# Altium PCB Grabber.PCBDOC (part 3 of 5)
Units mil, origin at the board's own origin, x right, y up, seen from the top; angles counter-clockwise.
Board outline 2854.33 x 3937 mil, 4 copper layers (TopLayer, Internal Plane 2, Layer 1, Bottom Layer), stack 60.752 mil thick; 159 components, 116 nets, 684 pads, 241 vias.
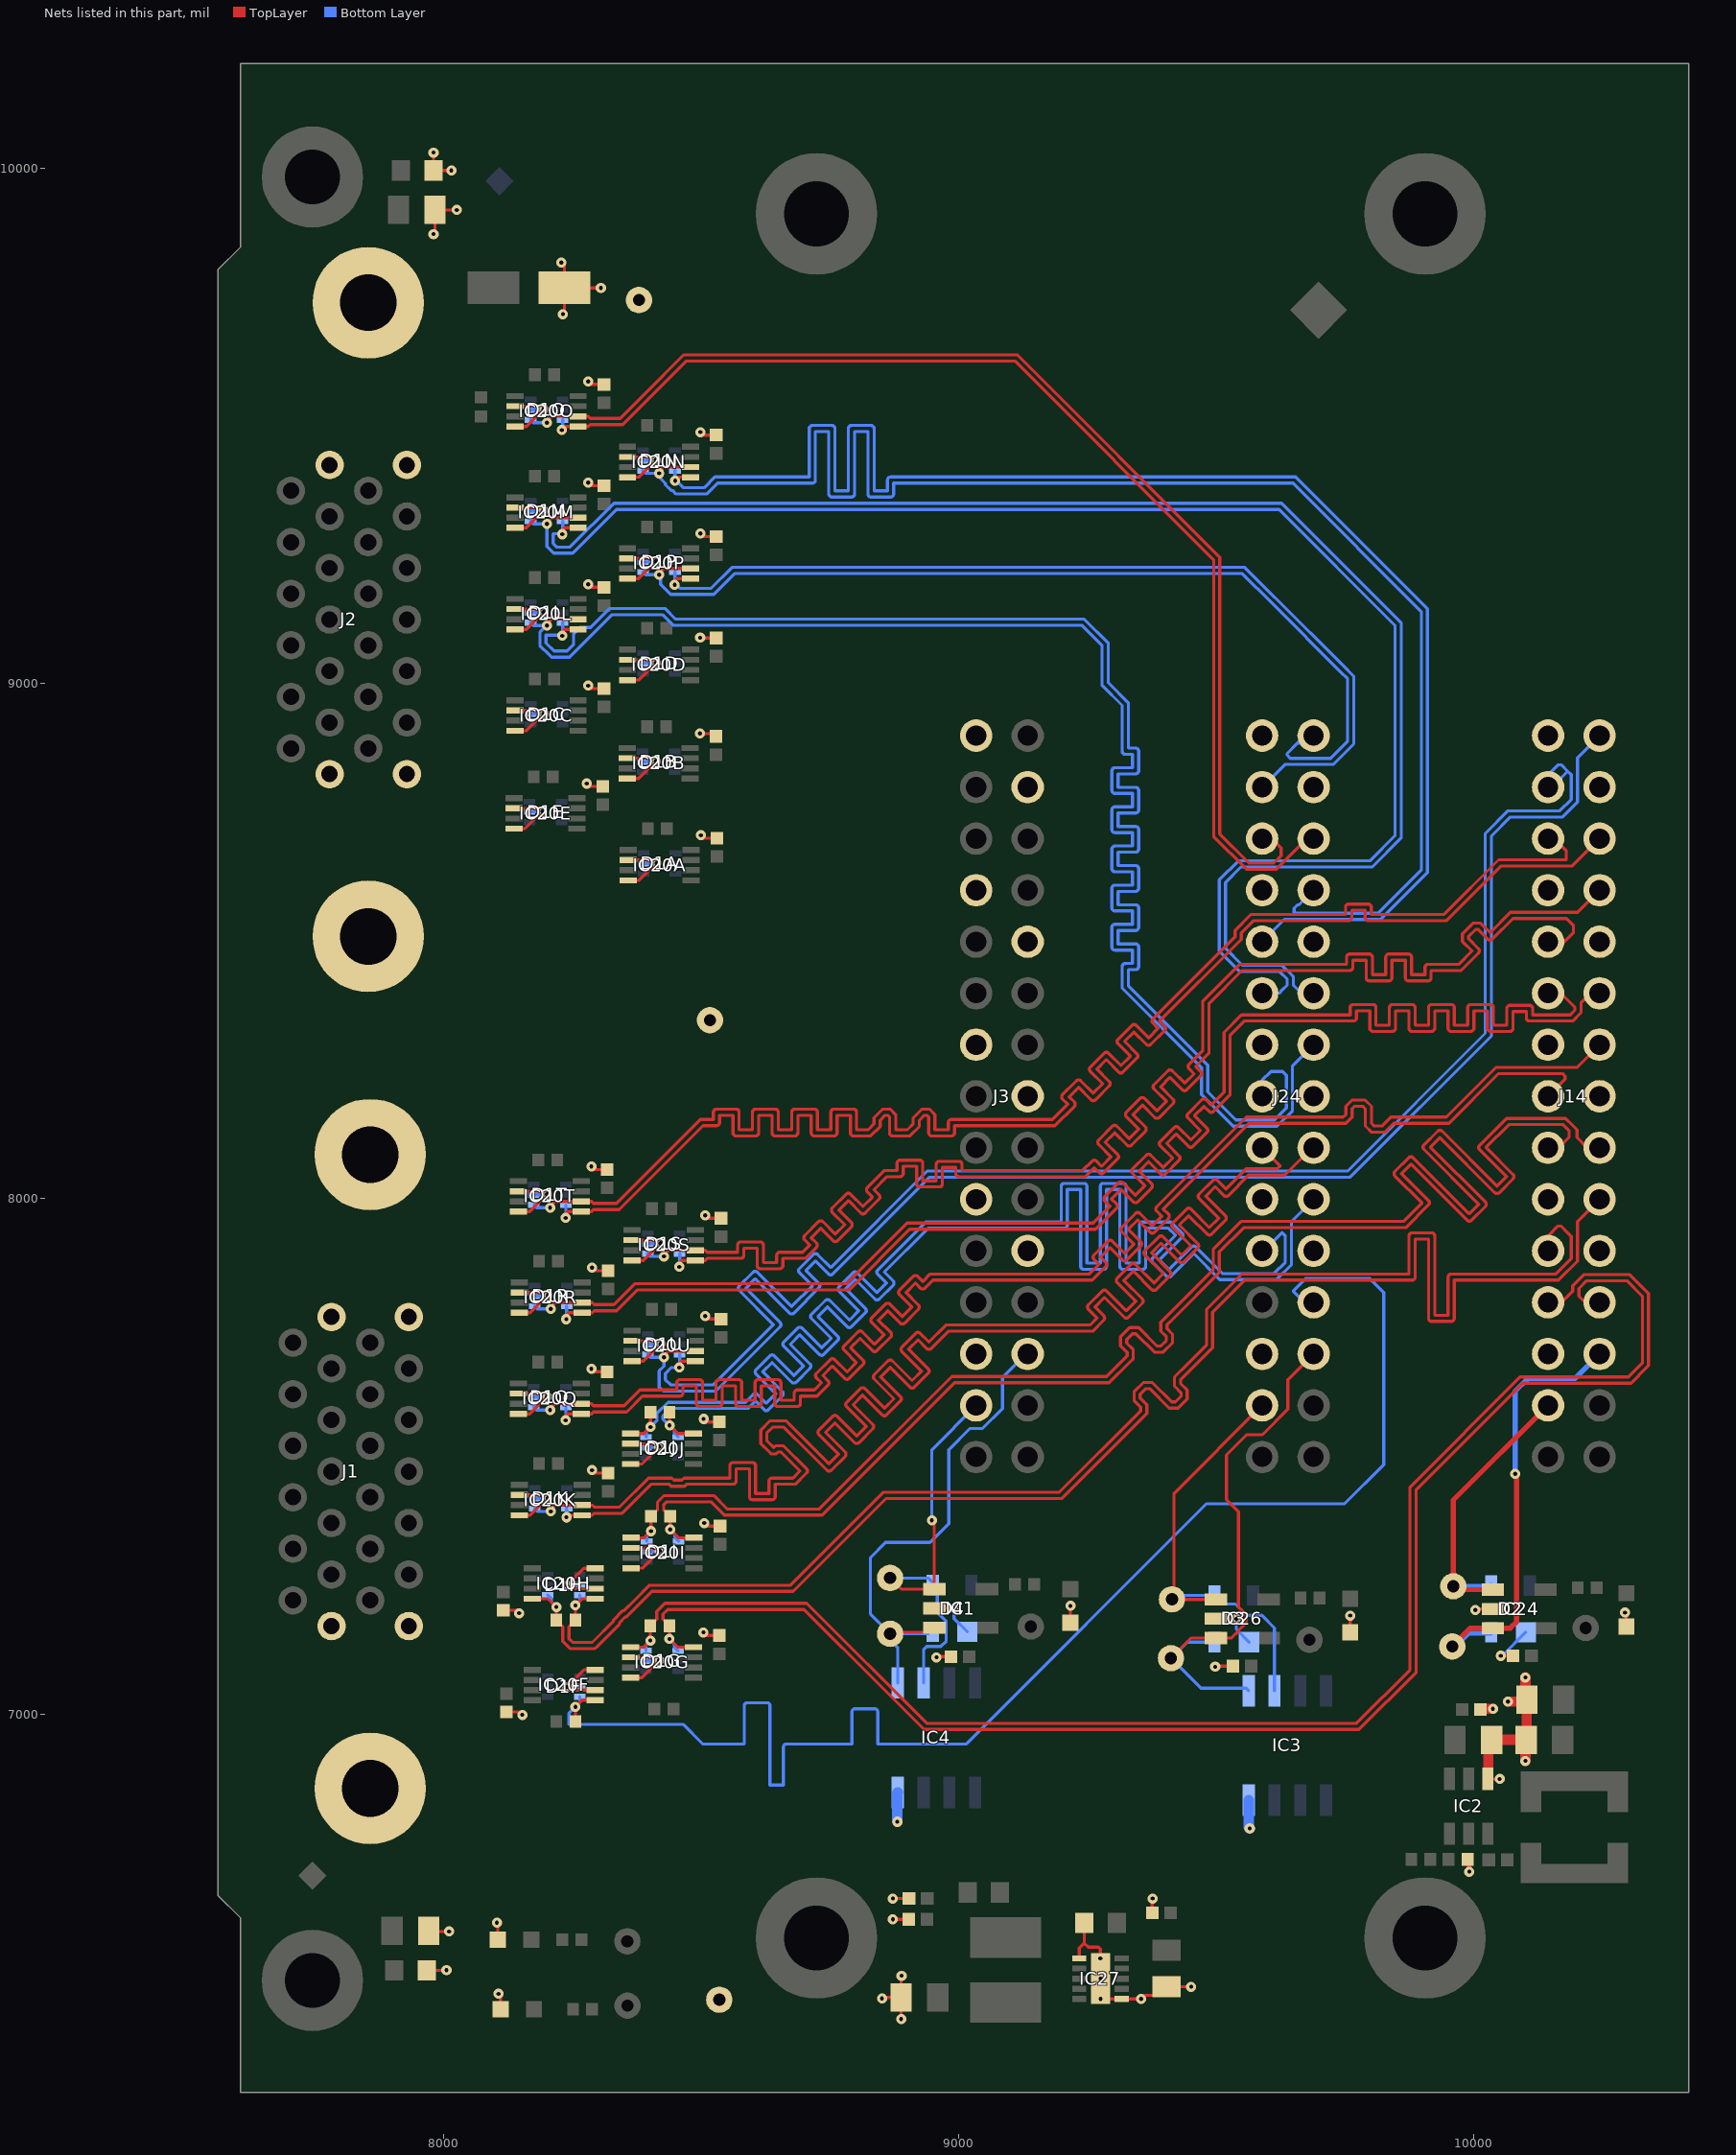
[diagram p4: the nets of this part, all layers, seen from the top]

## Via types
v1: diameter 19.68, hole 7.87, TopLayer to Bottom Layer, tented both sides, 241 vias

## Nets (pads, with @x,y where several pads share a name; then routed paths per layer and width w, separated by ;. In a path a pad name is that pad's centre, name@x,y a point inside that pad or via, vN(x,y) a via of type N, cw(c..) or ccw(c..) an arc to the next point about the centre after c; other vN are vias at no path point) (continued)
GND: B5.1 B7.1 B9.1 C1.2 C2.2 C3.1 C5.1 C6.1 C7.1 C8.1 C47A.1 C47B.1 C47C.1 C47D.1 C47E.1 C47F.1 C47G.1 C47H.1 C47I.1 C47J.1 C47K.1 C47L.1 C47M.1 C47N.1 C47O.1 C47P.1 C47Q.1 C47R.1 C47S.1 C47T.1 C47U.1 C58.1 C59.1 C62.2 C64.1 C65.1 C66.1 C67.1 C68.1 D1A.2 D1B.2 D1C.2 D1D.2 D1E.2 D1F.2 D1G.2 D1H.2 D1I.2 D1J.2 D1K.2 D1L.2 D1M.2 D1N.2 D1O.2 D1P.2 D1Q.2 D1R.2 D1S.2 D1T.2 D1U.2 D2.1 D3.1 D4.1 IC1.2 IC2.1 IC3.4 IC4.4 IC20A.2 IC20A.4 IC20B.2 IC20B.4 IC20C.2 IC20C.4 IC20D.2 IC20D.4 IC20E.2 IC20E.4 IC20F.2 IC20F.4 IC20G.2 IC20G.4 IC20H.2 IC20H.4 IC20I.2 IC20I.4 IC20J.2 IC20J.4 IC20K.2 IC20K.4 IC20L.2 IC20L.4 IC20M.2 IC20M.4 IC20N.2 IC20N.4 IC20O.2 IC20O.4 IC20P.2 IC20P.4 IC20Q.2 IC20Q.4 IC20R.2 IC20R.4 IC20S.2 IC20S.4 IC20T.2 IC20T.4 IC20U.2 IC20U.4 IC24.2 IC26.2 IC27.1 IC27.6 IC27.11 J1.1 J1.13 J1.14 J1.26 J1.27 J1.28 J2.1 J2.13 J2.14 J2.26 J2.27 J2.28 J3.1 J3.4 J3.7 J3.10 J3.13 J3.16 J3.19 J3.22 J3.25 J14.1 J14.4 J14.7 J14.10 J14.13 J14.16 J14.19 J14.22 J14.25 J24.1 J24.4 J24.7 J24.10 J24.13 J24.16 J24.19 J24.22 J24.25 LD1.1 LD5.1 LD6.1 LD7.1 LD8.1 R5.1 R6.1 R11.1 R122.1 | length 6027
  TopLayer w6: R6.1@7967.5,6502.22 8005.22,6502.22 v1(8006,6503) ; C2.2@7971.43,6578.99 7972.43,6578 v1(8011,6578) ; v1(7980.84,9872.33) 7983.91,9875.41 C1.2@7983.91,9919.32 v1(8026.24,9919.32) ; v1(7980.84,10030.68) R5.1@7980.84,9996 v1(8015.45,9996) ; v1(8104,6595) 8105.52,6593.48 LD6.1@8105.52,6562 ; v1(8107,6457) 8110.92,6453.08 LD5.1@8110.92,6427.42 ; C47H.1@8116.3,7201.59 8146.1,7201.59 8147.09,7200.61 v1(8147.09,7195.72) ; C47F.1@8122.46,7004.15 8152.26,7004.15 8153.24,7003.17 v1(8153.24,6998.28) ; IC20E.4@8136.91,8718.44 8158.56,8718.44 v1(8192.02,8751.91) 8186.12,8757.81 IC20E.2@8136.91,8757.81 ; IC20C.4@8139.46,8908.4 8161.12,8908.4 v1(8194.58,8941.87) 8188.68,8947.77 IC20C.2@8139.46,8947.77 ; IC20L.4@8139.46,9105.25 8161.12,9105.25 v1(8194.58,9138.72) 8188.68,9144.62 IC20L.2@8139.46,9144.62 ; IC20M.4@8139.46,9302.38 8161.12,9302.38 v1(8194.58,9335.84) 8188.68,9341.75 IC20M.2@8139.46,9341.75 ; IC20O.4@8139.46,9498.95 8161.12,9498.95 v1(8194.58,9532.42) 8188.68,9538.32 IC20O.2@8139.46,9538.32 ; IC20Q.4@8145.76,7582.61 8167.42,7582.61 v1(8200.88,7616.08) 8194.98,7621.98 IC20Q.2@8145.76,7621.98 ; IC20T.4@8145.76,7975.29 8167.42,7975.29 v1(8200.88,8008.76) 8194.98,8014.66 IC20T.2@8145.76,8014.66 ; IC20K.4@8147.14,7385.8 8168.8,7385.8 v1(8202.26,7419.27) 8196.35,7425.17 IC20K.2@8147.14,7425.17 ; IC20R.4@8147.14,7778.8 8168.8,7778.8 v1(8202.26,7812.26) 8196.35,7818.17 IC20R.2@8147.14,7818.17 ; v1(8229.03,9817.21) 8234.9,9811.35 C62.2@8234.9,9768 ; v1(8231.98,9716.98) 8234.9,9719.89 C62.2@8234.9,9768 ; v1(8278.36,8806) 8278.36,8801.12 8279.35,8800.13 C47E.1@8309.15,8800.13 ; v1(8280.92,8995.96) 8280.92,8991.08 8281.91,8990.09 C47C.1@8311.71,8990.09 ; v1(8280.92,9192.81) 8280.92,9187.93 8281.91,9186.94 C47L.1@8311.71,9186.94 ; v1(8280.92,9389.94) 8280.92,9385.06 8281.91,9384.07 C47M.1@8311.71,9384.07 ; v1(8280.92,9586.51) 8280.92,9581.63 8281.91,9580.65 C47O.1@8311.71,9580.65 ; v1(8287.22,7670.17) 8287.22,7665.29 8288.2,7664.31 C47Q.1@8318.01,7664.31 ; v1(8287.22,8062.85) 8287.22,8057.97 8288.2,8056.98 C47T.1@8318.01,8056.98 ; v1(8288.6,7473.36) 8288.6,7468.48 8289.58,7467.5 C47K.1@8319.39,7467.5 ; v1(8288.6,7866.35) 8288.6,7861.47 8289.58,7860.49 C47R.1@8319.39,7860.49 ; IC20F.2@8294.7,7046.47 8245.49,7046.47 v1(8239.58,7052.38) 8273.05,7085.84 IC20F.4@8294.7,7085.84 ; IC20H.2@8294.7,7243.32 8245.49,7243.32 v1(8239.58,7249.23) 8273.05,7282.69 IC20H.4@8294.7,7282.69 ; v1(8305.76,9768) C62.2@8234.9,9768 ; IC20B.4@8356.98,8815.88 8378.64,8815.88 v1(8412.1,8849.35) 8406.2,8855.25 IC20B.2@8356.98,8855.25 ; IC20D.4@8357.38,9006.83 8379.03,9006.83 v1(8412.5,9040.29) 8406.59,9046.2 IC20D.2@8357.38,9046.2 ; IC20P.4@8357.38,9203.68 8379.03,9203.68 v1(8412.5,9237.14) 8406.59,9243.05 IC20P.2@8357.38,9243.05 ; IC20N.4@8357.38,9400.53 8379.03,9400.53 v1(8412.5,9433.99) 8406.59,9439.9 IC20N.2@8357.38,9439.9 ; IC20A.4@8358.36,8618.09 8380.02,8618.09 v1(8413.48,8651.55) 8407.57,8657.46 IC20A.2@8358.36,8657.46 ; IC20G.4@8363.28,7070.8 8384.94,7070.8 v1(8418.4,7104.27) 8412.5,7110.17 IC20G.2@8363.28,7110.17 ; IC20J.4@8363.56,7485.21 8385.21,7485.21 v1(8418.68,7518.68) 8412.77,7524.58 IC20J.2@8363.56,7524.58 ; IC20I.4@8364.66,7283.13 8386.31,7283.13 v1(8419.78,7316.59) 8413.87,7322.5 IC20I.2@8364.66,7322.5 ; IC20U.4@8366.63,7684.98 8388.29,7684.98 v1(8421.75,7718.44) 8415.85,7724.35 IC20U.2@8366.63,7724.35 ; IC20S.4@8366.63,7880.49 8388.28,7880.49 v1(8421.75,7913.95) 8415.84,7919.86 IC20S.2@8366.63,7919.86 ; v1(8498,8903) 8523.8,8903 C47B.1@8529.23,8897.57 ; v1(8498.44,9089.11) 8507.38,9089.11 8507.97,9088.52 C47D.1@8529.62,9088.52 ; v1(8498.83,9291.24) 8498.83,9286.35 8499.82,9285.37 C47P.1@8529.62,9285.37 ; v1(8498.83,9488.09) 8498.83,9483.2 8499.82,9482.22 C47N.1@8529.62,9482.22 ; v1(8499.82,8705.65) 8499.82,8700.76 8500.8,8699.78 C47A.1@8530.61,8699.78 ; v1(8504.74,7158.36) 8504.74,7153.48 8505.72,7152.5 C47G.1@8535.53,7152.5 ; v1(8505.02,7572.77) 8505.02,7567.89 8506,7566.91 C47J.1@8535.8,7566.91 ; v1(8506.12,7370.69) 8506.12,7365.8 8507.1,7364.82 C47I.1@8536.91,7364.82 ; v1(8508.09,7772.54) 8508.09,7767.65 8509.07,7766.67 C47U.1@8538.88,7766.67 ; v1(8508.09,7968.05) 8508.09,7963.17 8509.07,7962.18 C47S.1@8538.87,7962.18 ; v1(8851.34,6448.06) 8853.34,6450.05 C66.1@8888.56,6450.05 ; v1(8872.4,6601.63) C59.1@8903.24,6601.63 ; v1(8872.4,6641.99) C65.1@8903.61,6641.98 ; v1(8888.56,6408.06) C66.1@8888.56,6450.05 ; v1(8889.34,6492.06) 8888.56,6491.28 C66.1@8888.56,6450.05 ; IC1.2@8952.82,7205 v1(8991.19,7205) ; v1(8957,7110) 8958.47,7111.47 C3.1@8985.28,7111.47 ; LD7.1@9217,7177.52 v1(9217,7210) ; IC27.6@9233.95,6525.84 9233.95,6545.53 9243.8,6555.37 ; R122.1@9243.8,6594.74 9243.8,6555.37 ; C67.1@9375.69,6614.43 9375.69,6641 v1(9376.67,6641.98) ; v1(9451.32,6470.72) C68.1@9403.24,6470.72 9386.51,6453.99 9360.9,6453.99 v1(9354.01,6447.1) IC27.1@9316.63,6447.1 v1(9275.29,6447.1) v1(9275.29,6486.47) 9275,6486.76 9275,6543.98 9271.49,6547.49 9251.67,6547.49 9243.8,6555.37 ; v1(9498,7091.79) 9499.21,7093 C64.1@9532.28,7093 ; IC26.2@9499.55,7184.9 v1(9539,7184.9) ; LD8.1@9759.97,7158.52 v1(9759.97,7191) ; v1(10003,7202) 10005,7204 IC24.2@10036.82,7204 ; IC2.1@10027.4,6874.15 10027.55,6874 v1(10050,6874) ; v1(10052,7113) C58.1@10076.28,7113 ; v1(10293.15,7197) 10296,7194.15 LD1.1@10296,7169.52
  TopLayer w10: R11.1@9988,6718 9991,6715 v1(9991,6694)
  TopLayer w20: C5.1@10012.72,7009 10013.72,7010 v1(10037,7010) ; IC2.1@10027.4,6874.15 10028.23,6874.98 10028.23,6945.23 C6.1@10032,6949 ; C6.1@10034.43,6950 10091,6950 C8.1@10095,6954 ; v1(10066,7024) 10099.13,7024 C7.1@10103.13,7028 10100,7031.13 v1(10100,7071) ; C7.1@10094,7023 10102.35,7014.65 10102.35,6950.78 C8.1@10101.57,6950 10100,6948.43 v1(10100,6909)
  Bottom Layer w6: D1E.2@8166.83,8750.92 8191.04,8750.92 v1(8192.02,8751.91) ; D1C.2@8169.39,8940.88 8193.6,8940.88 v1(8194.58,8941.87) ; D1L.2@8169.39,9137.73 8193.6,9137.73 v1(8194.58,9138.72) ; D1M.2@8169.39,9334.86 8193.6,9334.86 v1(8194.58,9335.84) ; D1O.2@8169.39,9531.43 8193.6,9531.43 v1(8194.58,9532.42) ; D1Q.2@8175.69,7615.09 8199.9,7615.09 v1(8200.88,7616.08) ; D1T.2@8175.69,8007.77 8199.9,8007.77 v1(8200.88,8008.76) ; D1K.2@8177.06,7418.28 8201.28,7418.28 v1(8202.26,7419.27) ; D1R.2@8177.06,7811.28 8201.28,7811.28 v1(8202.26,7812.26) ; v1(8239.58,7052.38) 8240.57,7053.36 D1F.2@8264.78,7053.36 ; v1(8239.58,7249.23) 8240.57,7250.21 D1H.2@8264.78,7250.21 ; D1B.2@8386.91,8848.36 8411.12,8848.36 v1(8412.1,8849.35) ; D1D.2@8387.3,9039.31 8411.51,9039.31 v1(8412.5,9040.29) ; D1P.2@8387.3,9236.16 8411.51,9236.16 v1(8412.5,9237.14) ; D1N.2@8387.3,9433.01 8411.51,9433.01 v1(8412.5,9433.99) ; D1A.2@8388.28,8650.57 8412.5,8650.57 v1(8413.48,8651.55) ; D1G.2@8393.2,7103.28 8417.42,7103.28 v1(8418.4,7104.27) ; D1J.2@8393.48,7517.69 8417.69,7517.69 v1(8418.68,7518.68) ; D1I.2@8394.58,7315.61 8418.8,7315.61 v1(8419.78,7316.59) ; D1U.2@8396.55,7717.46 8420.77,7717.46 v1(8421.75,7718.44) ; D1S.2@8396.55,7912.97 8420.76,7912.97 v1(8421.75,7913.95) ; v1(8991.19,7205) 8991.19,7185.33 D4.1@9016.8,7159.72 ; v1(9539,7184.9) 9539,7164.16 D3.1@9563.53,7139.63 ; v1(10052,7113) 10055.07,7113 D2.1@10100.8,7158.72
  Bottom Layer w20: v1(8881,6791) 8881,6847 IC4.4@8882,6848 ; IC3.4@9563,6832.7 9563,6780 v1(9565,6778)
  other v1: 9275,6525.84
I2C0_SCL: B2.1 D2.3 IC24.1 J14.27 | length 581.2
  TopLayer w10: IC24.1@10036.82,7241.4 9966.6,7241.4 B2.1@9960,7248 9960,7415 J14.27@10144,7599
  Bottom Layer w10: B2.1@9960,7248 10032.59,7248 D2.3@10033.87,7249.28
I2C0_SDA: B1.1 D2.2 IC24.3 J14.26 | length 874.8
  TopLayer w10: B1.1@9958,7131.11 9993.49,7166.6 10070.6,7166.6 10083,7179 10083,7463 v1(10080,7466)
  Bottom Layer w10: B1.1@9958,7131.11 9964.27,7131.11 9989.84,7156.68 10031.82,7156.68 D2.2@10033.87,7158.72 ; v1(10080,7466) 10080,7626.3 10104.7,7651 10196,7651 J14.26@10244,7699
I2C1_SCL: B4.1 D3.3 IC3.6 IC26.1 J24.27 | length 891.6
  TopLayer w6: IC26.1@9499.55,7222.31 9414.48,7222.31 B4.1@9414.07,7222.72 9418.14,7226.79 9418.14,7428.14 J24.27@9589,7599
  Bottom Layer w6: B4.1@9414.07,7222.72 9414.07,7224.91 cw(c9420.07,7224.87) 9415.86,7229.14 cw(c9423.65,7221.19) 9427.96,7231.45 9431.02,7230.18 D3.3@9496,7230.18 ; D3.3@9496,7230 9496,7222.9 9505.41,7213.5 9537.06,7213.5 9558.91,7191.64 9588.36,7191.64 9613,7167 IC3.6@9613,7045.3
I2C1_SDA: B3.1 D3.2 IC3.5 IC26.3 J24.26 | length 1064.3
  TopLayer w6: B3.1@9412.13,7108.36 9451.27,7147.5 9529.5,7147.5 9543.05,7161.05 9543.05,7162.3 9557.84,7177.1 9557.84,7192.71 9543.05,7207.5 9543.05,7392.95 9519.81,7416.19 9519.81,7503.02 9558.8,7542 9589.27,7542 9639,7591.73 9639,7649 J24.26@9689,7699
  Bottom Layer w6: B3.1@9412.13,7108.36 9443.4,7139.63 D3.2@9496.6,7139.63 ; B3.1@9420,7101 9420,7100.49 9470.49,7050 9558.3,7050 IC3.5@9563,7045.3
I2C2_SCL: B15.1 D4.3 IC1.1 IC4.6 J3.27 | length 807.2
  TopLayer w6: B15.1@8867,7264 8888.6,7242.4 IC1.1@8952.82,7242.4 8952.82,7371.18 v1(8948,7376)
  Bottom Layer w6: B15.1@8867,7264 8941.06,7264 8949.87,7255.19 D4.3@8949.87,7250.28 ; IC4.6@8932,7060.6 8932,7125 8938.04,7131.04 8965.41,7131.04 8976,7141.63 8976,7179.63 8958.68,7196.96 8958.68,7239.32 D4.3@8954,7244 ; v1(8948,7376) 8948,7513 J3.27@9034,7599
I2C2_SDA: B14.1 D4.2 IC1.3 IC4.5 J3.26 | length 1041.5
  TopLayer w6: B14.1@8867,7155.79 8870,7158.79 8944.01,7158.79 IC1.3@8952.82,7167.6
  Bottom Layer w6: B14.1@8864,7148 8864,7146.56 8882,7128.56 IC4.5@8882,7060.6 ; D4.2@8949.87,7159.72 8949.87,7162.19 8941.06,7171 8941.06,7155.79 B14.1@8867,7155.79 8829,7193.79 8829,7303.73 8858.2,7332.93 8944.42,7332.93 8981,7369.51 8981,7513 9022.11,7554.11 9046.38,7554.11 9085,7592.73 9085,7653 9131,7699 J3.26@9134,7699
LVDS0_N: D1U.6 IC20U.5 J14.3 | length 3026.7
  TopLayer w6: v1(8458.09,7672.54) 8458.09,7680.95 8462.11,7684.98 IC20U.5@8488.68,7684.98
  Bottom Layer w6: D1U.6@8458.76,7697.77 8458.76,7673.2 v1(8458.09,7672.54) 8442.49,7672.54 8431,7661.05 8431,7648.85 8440.85,7639 8524,7639 8640.68,7755.68 8574.21,7822.15 cw(c8578.45,7826.39) 8574.21,7830.63 ; 8574.23,7830.65 8601.08,7857.5 cw(c8605.32,7853.26) 8609.56,7857.5 ; 8609.58,7857.48 8676.03,7791.03 8716.31,7831.31 8691.11,7856.5 cw(c8695.35,7860.74) 8691.11,7864.99 8717.98,7891.86 cw(c8722.22,7887.61) 8726.47,7891.86 8751.66,7866.66 8939,8054 9755,8054 10022,8321 10022,8708.97 10066.03,8753 10167,8753 10189,8775 10189,8823 10182,8830 ; 10182,8830 10170,8842 10163,8842 10144,8823 J14.3@10144,8799 10151,8799 10182,8830
LVDS0_P: D1U.1 IC20U.6 J14.2 | length 3068.3
  TopLayer w6: v1(8428.09,7692.54) 8428.09,7695.25 8437.5,7704.66 IC20U.6@8488.68,7704.66
  Bottom Layer w6: D1U.1@8396.55,7697.77 8401.79,7692.54 v1(8428.09,7692.54) 8428.09,7675.11 8419,7666.02 8419,7634.65 8426.65,7627 8528.97,7627 8532.49,7630.51 8653.41,7751.44 ccw(c8649.16,7755.68) 8655.16,7755.68 ccw(c8649.16,7755.68) 8653.41,7759.92 ; 8653.39,7759.94 8586.94,7826.39 8605.32,7844.77 8671.79,7778.31 ccw(c8676.03,7782.55) 8680.28,7778.31 8729.03,7827.06 ccw(c8724.79,7831.31) 8730.79,7831.31 ccw(c8724.79,7831.31) 8729.03,7835.55 8703.84,7860.74 8722.22,7879.13 8747.42,7853.93 ccw(c8751.66,7858.18) 8755.9,7853.93 8943.97,8042 9759.97,8042 10034,8316.03 10034,8704 10071,8741 10171.97,8741 10201,8770.03 10201,8856 J14.2@10244,8899
LVDS1_N: D1T.6 IC20T.5 J14.6 | length 3020.9
  TopLayer w6: v1(8237.22,7962.85) 8237.22,7971.27 8241.24,7975.29 IC20T.5@8267.81,7975.29 8287.54,7975.29 8291.39,7979.13 8341.1,7979.13 8503.97,8142 8530,8142 ccw(c8530,8148) 8536,8148 8536,8162 8562,8162 8562,8128 ccw(c8568,8128) 8568,8122 8606,8122 ccw(c8606,8128) 8612,8128 8612,8162 8638,8162 8638,8128 ccw(c8644,8128) 8644,8122 8682,8122 ccw(c8682,8128) 8688,8128 8688,8162 8714,8162 8714,8128 ccw(c8720,8128) 8720,8122 8758,8122 ccw(c8758,8128) 8764,8128 8764,8162 8790,8162 8790,8128 ccw(c8796,8128) 8796,8122 8829.46,8122 8847.73,8140.27 8847.73,8152.21 8857.51,8162 8862.49,8162 8866,8158.48 8866,8128 ccw(c8872,8128) 8872,8122 8905.46,8122 8923.73,8140.27 8923.73,8152.21 8933.51,8162 8938.49,8162 8942,8158.48 8942,8128 ccw(c8948,8128) 8948,8122 8986,8122 ccw(c8986,8128) 8992,8128 8992,8142 9186.97,8142 9224.43,8179.46 ; 9224.42,8179.45 ccw(c9220.19,8183.71) 9226.19,8183.71 ccw(c9220.19,8183.71) 9224.43,8187.95 9214.54,8197.85 9232.92,8216.23 9256.96,8192.19 ccw(c9261.2,8196.43) 9265.47,8192.21 9292.32,8219.06 ccw(c9288.07,8223.31) 9294.07,8223.31 ccw(c9288.07,8223.31) 9292.32,8227.55 9268.28,8251.59 9286.66,8269.97 9310.7,8245.93 ccw(c9314.94,8250.18) 9319.21,8245.95 9346.06,8272.8 ccw(c9341.81,8277.05) 9347.81,8277.05 ccw(c9341.81,8277.05) 9346.06,8281.29 9322.02,8305.33 9340.4,8323.71 9364.44,8299.67 ccw(c9368.68,8303.92) 9372.95,8299.69 ; 9372.93,8299.67 9399.8,8326.54 ccw(c9395.55,8330.79) 9401.55,8330.79 ccw(c9395.55,8330.79) 9399.8,8335.03 9389.9,8344.93 9548.51,8503.54 9548.51,8515.78 9572.73,8540 9757,8540 ccw(c9757,8546) 9763,8546 9763,8560 9789,8560 9789,8546 ccw(c9795,8546) 9795,8540 9946.97,8540 10052.97,8646 10179,8646 10191,8646 J14.6@10244,8699
  Bottom Layer w6: v1(8237.22,7962.85) 8237.89,7963.52 D1T.6@8237.89,7988.09
LVDS1_P: D1T.1 IC20T.6 J14.5 | length 3025.7
  TopLayer w6: v1(8207.22,7982.85) 8207.22,7985.57 8216.63,7994.98 IC20T.6@8267.81,7994.98 8287.54,7994.98 8291.39,7991.13 8336.13,7991.13 8499,8154 8524,8154 8524,8168 cw(c8530,8168) 8530,8174 8568,8174 cw(c8568,8168) 8574,8168 8574,8134 8600,8134 8600,8168 cw(c8606,8168) 8606,8174 8644,8174 cw(c8644,8168) 8650,8168 8650,8134 8676,8134 8676,8168 cw(c8682,8168) 8682,8174 8720,8174 cw(c8720,8168) 8726,8168 8726,8134 8752,8134 8752,8168 cw(c8758,8168) 8758,8174 8796,8174 cw(c8796,8168) 8802,8168 8802,8134 8824.49,8134 8835.73,8145.24 8835.73,8157.18 8852.54,8174 8867.46,8174 8878,8163.45 8878,8134 8900.49,8134 8911.73,8145.24 8911.73,8157.18 8928.54,8174 8943.46,8174 8954,8163.45 8954,8134 8980,8134 8980,8148 cw(c8986,8148) 8986,8154 9182,8154 9211.71,8183.71 9201.81,8193.61 cw(c9206.05,8197.85) 9201.83,8202.11 ; 9201.81,8202.09 9228.68,8228.96 cw(c9232.92,8224.72) 9237.18,8228.94 ; 9237.16,8228.96 9261.2,8204.92 9279.59,8223.3 9255.55,8247.35 cw(c9259.79,8251.59) 9255.57,8255.85 9282.42,8282.7 cw(c9286.66,8278.46) 9290.92,8282.68 9314.94,8258.66 9333.33,8277.05 9309.29,8301.09 cw(c9313.53,8305.33) 9309.29,8309.57 9336.16,8336.44 cw(c9340.4,8332.2) 9344.64,8336.44 9368.68,8312.4 9387.07,8330.79 9377.17,8340.68 cw(c9381.41,8344.93) 9377.19,8349.19 ; 9377.17,8349.17 9536.51,8508.51 9536.51,8520.75 9567.76,8552 9751,8552 9751,8566 cw(c9757,8566) 9757,8572 9795,8572 cw(c9795,8566) 9801,8566 9801,8552 9942,8552 10048,8658 10179,8658 10179,8676 10162,8693 J14.5@10144,8693
  Bottom Layer w6: D1T.1@8175.69,7988.09 8180.92,7982.85 v1(8207.22,7982.85)
LVDS2_N: D1S.6 IC20S.5 J14.9 | length 2973.1
  TopLayer w6: v1(8458.09,7868.05) 8458.09,7876.46 8462.11,7880.49 IC20S.5@8488.68,7880.49 8508.41,7880.49 8512.25,7884.33 8577,7884.33 ccw(c8577,7890.33) 8583,7890.33 8583,7904.33 8609,7904.33 8609,7870.33 ccw(c8615,7870.33) 8615,7864.33 8653,7864.33 ccw(c8653,7870.33) 8659,7870.33 8659,7884.33 8702.3,7884.33 8723.86,7905.89 ccw(c8719.61,7910.13) 8725.61,7910.13 ccw(c8719.61,7910.13) 8723.86,7914.37 8713.96,7924.27 8732.34,7942.66 8756.38,7918.61 ccw(c8760.63,7922.86) 8764.89,7918.63 ; 8764.87,7918.61 8791.74,7945.48 ccw(c8787.5,7949.73) 8793.5,7949.73 ccw(c8787.5,7949.73) 8791.74,7953.97 8767.7,7978.01 8786.08,7996.4 8810.12,7972.36 ccw(c8814.37,7976.6) 8818.63,7972.37 ; 8818.61,7972.36 8845.48,7999.23 ccw(c8841.24,8003.47) 8847.24,8003.47 ccw(c8841.24,8003.47) 8845.48,8007.71 8835.58,8017.61 8860.97,8043 8886.49,8043 ccw(c8886.49,8049) 8892.49,8049 8892.49,8063 8918.49,8063 8918.49,8029 ccw(c8924.49,8029) 8924.49,8023 8962.49,8023 ccw(c8962.49,8029) 8968.49,8029 8968.49,8060.78 8994.49,8060.78 8994.49,8049 ccw(c9000.49,8049) 9000.49,8043 9245.97,8043 9263.28,8060.31 9273.18,8050.41 ccw(c9277.43,8054.66) 9281.69,8050.43 ; 9281.67,8050.41 9308.54,8077.28 ; 9308.52,8077.27 ccw(c9304.3,8081.53) 9310.3,8081.53 ccw(c9304.3,8081.53) 9308.54,8085.77 9284.5,8109.81 9302.88,8128.2 9326.92,8104.15 ccw(c9331.17,8108.4) 9335.43,8104.17 ; 9335.41,8104.15 9362.28,8131.02 ccw(c9358.04,8135.27) 9364.04,8135.27 ccw(c9358.04,8135.27) 9362.26,8139.53 ; 9362.28,8139.51 9338.24,8163.55 9356.62,8181.94 9380.66,8157.89 ccw(c9384.91,8162.14) 9389.17,8157.91 9416.02,8184.76 ccw(c9411.78,8189.01) 9417.78,8189.01 ccw(c9411.78,8189.01) 9416.02,8193.25 9391.98,8217.29 9410.36,8235.68 9434.4,8211.63 ccw(c9438.65,8215.88) 9442.91,8211.65 9469.76,8238.5 ccw(c9465.52,8242.75) 9471.52,8242.75 ccw(c9465.52,8242.75) 9469.76,8246.99 9460.59,8256.16 9459.86,8256.89 9486,8283.03 9486,8379 9550,8443 9759,8443 ccw(c9759,8449) 9765,8449 9765,8463 9766.03,8463 9791,8463 9791,8429 ccw(c9797,8429) 9797,8423 9835,8423 ccw(c9835,8429) 9841,8429 9841,8463 9867,8463 9867,8429 ccw(c9873,8429) 9873,8423 9911,8423 ccw(c9911,8429) 9917,8429 9917,8441.97 9917,8443 9974.97,8443 10008.92,8476.95 ccw(c10004.68,8481.19) 10010.68,8481.19 ccw(c10004.68,8481.19) 10008.92,8485.43 9989.87,8504.48 9989.87,8509.45 10003.29,8522.87 10008.26,8522.87 10027.31,8503.82 ccw(c10031.55,8508.06) 10035.81,8503.84 ; 10035.79,8503.82 10075.97,8544 10180,8544 10193,8531 10193,8516 10176,8499 J14.9@10144,8499
  Bottom Layer w6: v1(8458.09,7868.05) 8458.76,7868.72 D1S.6@8458.76,7893.28
LVDS2_P: D1S.1 IC20S.6 J14.8 | length 2997.1
  TopLayer w6: v1(8428.09,7888.05) 8428.09,7890.76 8437.5,7900.17 IC20S.6@8488.68,7900.17 8508.41,7900.17 8512.25,7896.33 8571,7896.33 8571,7910.33 cw(c8577,7910.33) 8577,7916.33 8615,7916.33 cw(c8615,7910.33) 8621,7910.33 8621,7876.33 8647,7876.33 8647,7890.33 cw(c8653,7890.33) 8653,7896.33 8697.33,7896.33 8711.13,7910.13 8701.23,7920.03 cw(c8705.47,7924.27) 8701.25,7928.53 ; 8701.23,7928.51 8728.1,7955.38 cw(c8732.34,7951.14) 8736.6,7955.37 ; 8736.59,7955.38 8760.63,7931.34 8779.01,7949.73 8754.97,7973.77 cw(c8759.21,7978.01) 8754.99,7982.27 ; 8754.97,7982.25 8781.84,8009.12 ; 8781.82,8009.11 cw(c8786.08,8004.88) 8790.33,8009.12 8814.37,7985.08 8832.75,8003.47 8822.85,8013.37 cw(c8827.1,8017.61) 8822.87,8021.87 8856,8055 8880.49,8055 8880.49,8069 cw(c8886.49,8069) 8886.49,8075 8924.49,8075 cw(c8924.49,8069) 8930.49,8069 8930.49,8035 8956.49,8035 8956.49,8066.78 cw(c8962.49,8066.78) 8962.49,8072.78 9000.49,8072.78 cw(c9000.49,8066.78) 9006.49,8066.78 9006.49,8055 9241,8055 9259.04,8073.04 cw(c9263.28,8068.8) 9267.53,8073.04 9277.43,8063.14 9295.81,8081.53 9271.77,8105.57 cw(c9276.01,8109.81) 9271.79,8114.07 ; 9271.77,8114.05 9298.64,8140.92 cw(c9302.88,8136.68) 9307.14,8140.91 ; 9307.12,8140.92 9331.17,8116.88 9349.55,8135.27 9325.51,8159.31 ; 9325.53,8159.29 cw(c9329.75,8163.55) 9325.51,8167.79 9352.38,8194.66 cw(c9356.62,8190.42) 9360.87,8194.66 9384.91,8170.62 9403.29,8189.01 9379.25,8213.05 cw(c9383.49,8217.29) 9379.27,8221.55 9406.12,8248.4 cw(c9410.36,8244.16) 9414.61,8248.4 9438.65,8224.36 9457.03,8242.75 9447.13,8252.65 cw(c9451.37,8256.89) 9447.15,8261.15 9474,8288 9474,8383.97 9545.03,8455 9753,8455 9753,8469 cw(c9759,8469) 9759,8475 9797,8475 cw(c9797,8469) 9803,8469 9803,8435 9829,8435 9829,8469 cw(c9835,8469) 9835,8475 9873,8475 cw(c9873,8469) 9879,8469 9879,8435 9905,8435 9905,8449 cw(c9911,8449) 9911,8455 9970,8455 9996.19,8481.19 9977.87,8499.51 9977.87,8514.42 9998.32,8534.87 10013.23,8534.87 10031.55,8516.55 10071,8556 10176,8556 10201,8556 J14.8@10244,8599
  Bottom Layer w6: D1S.1@8396.55,7893.28 8401.79,7888.05 v1(8428.09,7888.05)
LVDS3_N: D1R.6 IC20R.5 J14.12 | length 2967.9
  TopLayer w6: v1(8238.6,7766.35) 8238.6,7774.77 8242.62,7778.8 IC20R.5@8269.19,7778.8 8288.92,7778.8 8292.76,7782.64 8335.97,7782.64 8376.33,7823 8787,7823 8905,7941 9265.97,7941 9306.4,7981.43 ccw(c9302.18,7985.69) 9308.18,7985.69 ccw(c9302.18,7985.69) 9306.42,7989.93 9296.52,7999.83 9314.91,8018.22 9338.95,7994.18 ccw(c9343.19,7998.42) 9347.45,7994.2 9374.3,8021.05 ccw(c9370.06,8025.29) 9376.06,8025.29 ccw(c9370.06,8025.29) 9374.3,8029.53 9350.26,8053.57 9368.65,8071.96 9392.69,8047.92 ccw(c9396.93,8052.16) 9401.19,8047.94 9428.02,8074.77 ccw(c9423.8,8079.03) 9429.8,8079.03 ccw(c9423.8,8079.03) 9428.04,8083.27 9404,8107.31 9422.39,8125.7 9446.43,8101.66 ccw(c9450.67,8105.9) 9454.93,8101.68 9481.78,8128.53 ccw(c9477.54,8132.77) 9483.54,8132.77 ccw(c9477.54,8132.77) 9481.78,8137.01 9457.74,8161.05 9476.13,8179.44 9486.03,8169.54 ccw(c9490.27,8173.78) 9494.53,8169.56 9527,8202.03 9527,8318 9554,8345 9766,8345 ccw(c9766,8351) 9772,8351 9772,8365 9798,8365 9798,8331 ccw(c9804,8331) 9804,8325 9842,8325 ccw(c9842,8331) 9848,8331 9848,8365 9874,8365 9874,8331 ccw(c9880,8331) 9880,8325 9918,8325 ccw(c9918,8331) 9924,8331 9924,8365 9950,8365 9950,8331 ccw(c9956,8331) 9956,8325 9994,8325 ccw(c9994,8331) 10000,8331 10000,8365 10026,8365 10026,8331 ccw(c10032,8331) 10032,8325 10070,8325 ccw(c10070,8331) 10076,8331 10076,8363.58 10102,8363.58 10102,8351 ccw(c10108,8351) 10108,8345 10191.97,8345 10208,8361.03 10208,8380 10227,8399 J14.12@10244,8399
  Bottom Layer w6: v1(8238.6,7766.35) 8239.27,7767.02 D1R.6@8239.27,7791.59
LVDS3_P: D1R.1 IC20R.6 J14.11 | length 2994
  TopLayer w6: v1(8208.6,7786.35) 8208.6,7789.07 8218.01,7798.48 IC20R.6@8269.19,7798.48 8288.92,7798.48 8292.76,7794.64 8331,7794.64 8371.36,7835 8782.03,7835 8900.03,7953 9261,7953 9293.69,7985.69 9283.79,7995.59 cw(c9288.04,7999.83) 9283.81,8004.1 9310.66,8030.95 cw(c9314.91,8026.7) 9319.17,8030.93 9343.19,8006.91 9361.57,8025.29 9337.53,8049.33 cw(c9341.78,8053.57) 9337.55,8057.84 ; 9337.53,8057.82 9364.4,8084.69 cw(c9368.65,8080.44) 9372.91,8084.67 ; 9372.89,8084.69 9396.93,8060.65 9415.31,8079.03 9391.27,8103.07 cw(c9395.52,8107.31) 9391.27,8111.56 9418.14,8138.43 cw(c9422.39,8134.18) 9426.63,8138.43 9450.67,8114.39 9469.05,8132.77 9445.01,8156.81 cw(c9449.26,8161.05) 9445.03,8165.32 ; 9445.01,8165.3 9471.88,8192.17 cw(c9476.13,8187.92) 9480.37,8192.17 9490.27,8182.27 9515,8207 9515,8322.97 9549.03,8357 9760,8357 9760,8371 cw(c9766,8371) 9766,8377 9804,8377 cw(c9804,8371) 9810,8371 9810,8337 9836,8337 9836,8371 cw(c9842,8371) 9842,8377 9880,8377 cw(c9880,8371) 9886,8371 9886,8337 9912,8337 9912,8371 cw(c9918,8371) 9918,8377 9956,8377 cw(c9956,8371) 9962,8371 9962,8337 9988,8337 9988,8371 cw(c9994,8371) 9994,8377 10032,8377 cw(c10032,8371) 10038,8371 10038,8337 10064,8337 10064,8369.58 cw(c10070,8369.58) 10070,8375.58 10108,8375.58 cw(c10108,8369.58) 10114,8369.58 10114,8357 10187,8357 10196,8366 10196,8372 10169,8399 J14.11@10144,8399
  Bottom Layer w6: D1R.1@8177.06,7791.59 8182.3,7786.35 v1(8208.6,7786.35)
LVDS4_N: D1Q.6 IC20Q.5 J14.15 | length 3003
  TopLayer w6: v1(8237.22,7570.17) 8237.22,7578.59 8241.24,7582.61 IC20Q.5@8267.81,7582.61 8287.54,7582.61 8291.39,7586.46 8355.97,7586.46 8386.51,7617 8459.06,7617 ccw(c8459.06,7623) 8465.06,7623 8465.06,7637 8491.06,7637 8491.06,7603 ccw(c8497.06,7603) 8497.06,7597 8535.06,7597 ccw(c8535.06,7603) 8541.06,7603 8541.06,7637 8567.06,7637 8567.06,7603 ccw(c8573.06,7603) 8573.06,7597 8611.06,7597 ccw(c8611.06,7603) 8617.06,7603 8617.06,7637 8643.06,7637 8643.06,7603 ccw(c8649.06,7603) 8649.06,7597 8687.06,7597 ccw(c8687.06,7603) 8693.06,7603 8693.06,7617 8725,7617 8746.56,7638.56 ccw(c8742.31,7642.8) 8748.31,7642.8 ccw(c8742.31,7642.8) 8746.56,7647.04 8736.66,7656.94 8755.04,7675.33 8779.08,7651.28 ccw(c8783.33,7655.53) 8787.59,7651.3 ; 8787.57,7651.28 8814.44,7678.15 ccw(c8810.2,7682.4) 8816.2,7682.4 ccw(c8810.2,7682.4) 8814.44,7686.64 8790.4,7710.68 8808.78,7729.07 8832.82,7705.02 ccw(c8837.07,7709.27) 8841.33,7705.04 ; 8841.31,7705.02 8868.18,7731.89 ; 8868.16,7731.88 ccw(c8863.94,7736.14) 8869.94,7736.14 ccw(c8863.94,7736.14) 8868.18,7740.38 8844.14,7764.42 8862.52,7782.81 8886.56,7758.76 ccw(c8890.81,7763.01) 8895.07,7758.78 ; 8895.05,7758.76 8921.92,7785.63 ccw(c8917.68,7789.88) 8923.68,7789.88 ccw(c8917.68,7789.88) 8921.92,7794.12 8897.88,7818.16 8916.26,7836.55 8926.16,7826.65 ccw(c8930.4,7830.89) 8934.67,7826.67 8950,7842 9258.97,7842 9285.42,7868.45 ccw(c9281.18,7872.69) 9287.18,7872.69 ccw(c9281.18,7872.69) 9285.42,7876.93 9275.52,7886.83 9293.91,7905.22 9317.95,7881.18 ccw(c9322.19,7885.42) 9326.45,7881.2 9353.3,7908.05 ccw(c9349.06,7912.29) 9355.06,7912.29 ccw(c9349.06,7912.29) 9353.3,7916.53 9329.26,7940.57 9347.65,7958.96 9371.69,7934.92 ccw(c9375.93,7939.16) 9380.19,7934.94 ; 9380.17,7934.92 9407.04,7961.79 ccw(c9402.8,7966.03) 9408.8,7966.03 ccw(c9402.8,7966.03) 9407.04,7970.27 9397.14,7980.17 9563.48,8146.51 9740,8146.51 9751.49,8146.51 9763.65,8158.67 9763.65,8174.58 9768.79,8179.72 9784.2,8179.72 9789.34,8174.58 9789.34,8141.37 9801.5,8129.2 9826.86,8129.2 9839.02,8141.37 9844.16,8146.51 9881.42,8146.51 9951.48,8146.51 10047.97,8243 10172,8243 10177,8238 10177,8232 J14.15@10144,8199
  Bottom Layer w6: v1(8237.22,7570.17) 8237.89,7570.84 D1Q.6@8237.89,7595.41
LVDS4_P: D1Q.1 IC20Q.6 J14.14 | length 3068.3
  TopLayer w6: v1(8207.22,7590.17) 8207.22,7592.89 8216.63,7602.3 IC20Q.6@8267.81,7602.3 8287.54,7602.3 8291.39,7598.46 8351,7598.46 8381.54,7629 8453.06,7629 8453.06,7643 cw(c8459.06,7643) 8459.06,7649 8497.06,7649 cw(c8497.06,7643) 8503.06,7643 8503.06,7609 8529.06,7609 8529.06,7643 cw(c8535.06,7643) 8535.06,7649 8573.06,7649 cw(c8573.06,7643) 8579.06,7643 8579.06,7609 8605.06,7609 8605.06,7643 cw(c8611.06,7643) 8611.06,7649 8649.06,7649 cw(c8649.06,7643) 8655.06,7643 8655.06,7609 8681.06,7609 8681.06,7623 cw(c8687.06,7623) 8687.06,7629 8720.03,7629 8733.83,7642.8 8723.93,7652.7 cw(c8728.17,7656.94) 8723.95,7661.2 8750.8,7688.05 cw(c8755.04,7683.81) 8759.3,7688.04 8783.33,7664.01 8801.71,7682.4 8777.67,7706.44 cw(c8781.91,7710.68) 8777.69,7714.94 ; 8777.67,7714.92 8804.54,7741.79 cw(c8808.78,7737.55) 8813.04,7741.78 ; 8813.02,7741.79 8837.07,7717.75 8855.45,7736.14 8831.41,7760.18 cw(c8835.65,7764.42) 8831.41,7768.66 8858.28,7795.53 cw(c8862.52,7791.29) 8866.76,7795.53 8890.81,7771.49 8909.19,7789.88 8885.15,7813.92 cw(c8889.39,7818.16) 8885.17,7822.42 8912.02,7849.27 cw(c8916.26,7845.03) 8920.5,7849.27 8930.4,7839.37 8945.03,7854 9254,7854 9272.69,7872.69 9262.79,7882.59 cw(c9267.04,7886.83) 9262.81,7891.1 9289.66,7917.95 cw(c9293.91,7913.7) 9298.17,7917.93 9322.19,7893.91 9340.57,7912.29 9316.53,7936.33 cw(c9320.78,7940.57) 9316.55,7944.84 ; 9316.53,7944.82 9343.4,7971.69 cw(c9347.65,7967.44) 9351.91,7971.67 ; 9351.89,7971.69 9375.93,7947.65 9393.59,7965.3 9394.31,7966.03 9384.42,7975.93 cw(c9388.66,7980.17) 9384.43,7984.43 ; 9384.42,7984.42 9558.5,8158.51 9740,8158.51 9746.52,8158.51 9751.65,8163.64 9751.65,8179.55 9763.82,8191.72 9789.17,8191.72 9801.34,8179.55 9801.34,8146.34 9806.47,8141.2 9821.89,8141.2 9827.02,8146.34 9839.19,8158.51 9881.42,8158.51 9946.51,8158.51 10043,8255 10172,8255 10200,8255 J14.14@10244,8299
  Bottom Layer w6: D1Q.1@8175.69,7595.41 8180.92,7590.17 v1(8207.22,7590.17)
LVDS5_N: D1I.3 IC20I.1 J14.18 R131I.1 | length 3068.3
  TopLayer w6: IC20I.1@8364.66,7342.18 8390.25,7342.18 v1(8403.05,7354.98) R131I.1@8403.05,7383.52 8415.55,7396.02 8415.55,7410.97 8428.58,7424 8524.58,7424 8550.55,7398.02 8730.02,7398.02 8987,7655 9287.19,7655 9322.36,7690.17 9326.97,7694.78 9326.97,7702.04 9314.15,7714.86 9314.15,7732.07 9332.08,7750 9349.28,7750 9384.98,7714.3 9392.25,7714.3 9403.14,7725.19 9403.14,7732.46 9392.5,7743.1 9392.5,7760.31 9407.04,7774.85 9494,7861.81 9494,7901.97 9548.03,7956 9863,7956 9899.19,7992.19 9846.87,8044.52 cw(c9851.11,8048.76) 9846.89,8053.02 ; 9846.87,8053 9873.74,8079.87 cw(c9877.98,8075.63) 9882.24,8079.85 ; 9882.22,8079.87 9991.12,7970.98 10009.5,7989.36 9902.98,8095.89 ; 9902.99,8095.87 cw(c9907.22,8100.13) 9902.98,8104.37 9929.85,8131.24 cw(c9934.09,8127) 9938.35,8131.23 10044.86,8024.72 10063.24,8043.1 10010.92,8095.43 cw(c10015.16,8099.67) 10010.93,8103.93 ; 10010.92,8103.92 10063,8156 10177.97,8156 10193.49,8140.49 10199.97,8134 10199.97,8119.03 10220,8099 10234.97,8099 J14.18@10244,8099
  Bottom Layer w6: D1I.3@8394.58,7335.29 8394.58,7346.51 v1(8403.05,7354.98)
LVDS5_P: D1I.4 IC20I.8 J14.17 R131I.2 | length 3032.4
  TopLayer w6: IC20I.8@8486.71,7342.18 8455.96,7342.18 v1(8440.06,7358.09) R131I.2@8440.06,7383.52 8427.55,7396.02 8427.55,7406 8433.55,7412 8519.61,7412 8545.58,7386.02 8734.99,7386.02 8991.97,7643 9292.16,7643 9330.85,7681.69 9338.97,7689.81 9338.97,7707.01 9326.15,7719.83 9326.15,7727.1 9337.05,7738 9344.31,7738 9380.01,7702.3 9397.22,7702.3 9415.14,7720.22 9415.14,7737.43 9404.5,7748.07 9404.5,7755.34 9415.53,7766.37 9506,7856.84 9506,7897 9553,7944 9867.97,7944 9911.92,7987.95 ccw(c9907.68,7992.19) 9913.68,7992.19 ccw(c9907.68,7992.19) 9911.9,7996.45 9859.59,8048.76 9877.98,8067.15 9986.87,7958.25 ccw(c9991.12,7962.49) 9995.36,7958.25 10022.23,7985.12 ; 10022.21,7985.1 ccw(c10017.99,7989.36) 10023.99,7989.36 ccw(c10017.99,7989.36) 10022.21,7993.63 ; 10022.23,7993.61 9915.7,8100.13 9934.09,8118.52 10040.61,8011.99 ccw(c10044.86,8016.23) 10049.1,8011.99 10075.97,8038.86 ccw(c10071.73,8043.1) 10077.73,8043.1 ccw(c10071.73,8043.1) 10075.95,8047.37 10023.64,8099.67 10067.97,8144 10173,8144 10185,8132 10185,8120 10167,8102 J14.17@10147,8102
  Bottom Layer w6: v1(8440.06,7358.09) 8449.31,7348.83 8449.31,7342.77 D1I.4@8456.79,7335.29
LVDS6_N: D1H.3 IC20H.1 J14.21 R131H.1 | length 2993
  TopLayer w6: IC20H.1@8294.7,7223.64 8269.11,7223.64 v1(8256.31,7210.84) R131H.1@8256.31,7182.3 8243.81,7169.8 8243.81,7146.19 8251,7139 8289,7139 8330.16,7180.16 8330.16,7182.57 8348.22,7200.64 8350.64,7200.64 8371,7221 8400,7250 8674,7250 8851,7427 8854.51,7430.51 9195.54,7430.51 9348.72,7583.69 9353.33,7588.3 9353.33,7595.56 9340.51,7608.38 9340.51,7625.59 9358.43,7643.51 9375.64,7643.51 9413.51,7605.64 9420.78,7605.64 9431.67,7616.54 9431.67,7623.8 9418.86,7636.62 9418.86,7653.83 9443.18,7678.15 9481,7715.97 9481,7784.97 9550.03,7854 9874,7854 9874,7928 cw(c9880,7928) 9880,7934 9918,7934 cw(c9918,7928) 9924,7928 9924,7774 9950,7774 9950,7848 cw(c9956,7848) 9956,7854 10159,7854 10189,7884 10189,7926.97 10180.99,7934.99 10168.97,7947 10163,7947 10144,7928 J14.21@10144,7899 J14.21@10145,7899
  Bottom Layer w6: v1(8256.31,7210.84) 8264.78,7219.31 D1H.3@8264.78,7230.53
LVDS6_P: D1H.4 IC20H.8 J14.20 R131H.2 | length 3044.5
  TopLayer w6: IC20H.8@8172.65,7223.64 8203.4,7223.64 v1(8219.31,7207.73) R131H.2@8219.31,7182.3 8231.81,7169.8 8231.81,7141.22 8242.51,7130.51 8246.03,7127 8293.97,7127 8297.49,7130.51 8342.16,7175.19 8342.16,7177.6 8353.2,7188.64 8355.61,7188.64 8404.97,7238 8678.97,7238 8859.49,7418.51 9200.51,7418.51 9357.2,7575.2 9365.33,7583.33 9365.33,7600.53 9352.51,7613.35 9352.51,7620.62 9363.4,7631.51 9370.67,7631.51 9408.54,7593.64 9425.75,7593.64 9443.67,7611.57 9443.67,7628.77 9430.86,7641.59 9430.86,7648.86 9451.67,7669.67 9493,7711 9493,7780 9555,7842 9880,7842 ccw(c9880,7848) 9886,7848 9886,7922 9912,7922 9912,7768 ccw(c9918,7768) 9918,7762 9956,7762 ccw(c9956,7768) 9962,7768 9962,7842 10163.97,7842 10201,7879.03 10201,7926.97 10201,7956 J14.20@10244,7999
  Bottom Layer w6: D1H.4@8202.57,7230.53 8210.06,7223.05 8210.06,7216.98 v1(8219.31,7207.73)
LVDS7_N: D1G.3 IC20G.1 J14.24 R131G.1 | length 2997.1
  TopLayer w6: IC20G.1@8363.28,7129.86 8388.87,7129.86 v1(8401.67,7142.65) R131G.1@8401.67,7171.2 8414.17,7183.7 8414.17,7198.97 8430.2,7215 8704.97,7215 8937.97,6982 9772.09,6982 9876,7085.91 9876,7440.3 10089.7,7654 10300,7654 10327,7681 10327,7811 10297,7841 10219.04,7841 10204,7825.96 10204,7811 10216,7799 J14.24@10244,7799 J14.24@10227,7816
  Bottom Layer w6: D1G.3@8393.2,7122.97 8393.2,7134.19 v1(8401.67,7142.65)
LVDS7_P: D1G.4 IC20G.8 J14.23 R131G.2 | length 3028
  TopLayer w6: IC20G.8@8485.33,7129.86 8454.58,7129.86 v1(8438.68,7145.76) R131G.2@8438.68,7171.2 8426.17,7183.7 8426.17,7194 8435.17,7203 8700,7203 8851.09,7051.91 8933,6970 9777.06,6970 9888,7080.94 9888,7435.33 10094.67,7642 10304.97,7642 10335.49,7672.51 10339,7676.03 10339,7815.97 10335.49,7819.49 10305.49,7849.49 10301.97,7853 10214.07,7853 10192,7830.93 10192,7820.97 10170.03,7799 J14.23@10144,7799
  Bottom Layer w6: v1(8438.68,7145.76) 8447.93,7136.51 8447.93,7130.45 D1G.4@8455.41,7122.97
LVDS8_N: D1P.6 IC20P.5 J24.3 | length 1834.8
  TopLayer w6: v1(8448.83,9191.79) 8448.83,9199.65 8452.86,9203.68 IC20P.5@8479.43,9203.68
  Bottom Layer w6: v1@8448.83,9191.24 v1@8449.39,9191.79 ; v1(8448.83,9191.79) v1@8449.39,9191.79 ; D1P.6@8449.5,9216.47 8449.5,9191.91 v1@8449.39,9191.79 ; J24.3@9589,8799 9633,8843 9726.97,8843 9767,8883.03 9767,9013.97 9746.63,9034.34 9726.26,9054.71 9690.9,9090.07 9672.52,9108.45 9555.46,9225.51 8560.3,9225.51 8519.74,9184.95 8459.19,9184.95 8452.35,9191.79 v1@8449.39,9191.79
LVDS8_P: D1P.1 IC20P.6 J24.2 | length 1926
  TopLayer w6: v1(8418.83,9211.24) 8418.83,9213.95 8428.24,9223.36 IC20P.6@8479.43,9223.36
  Bottom Layer w6: D1P.1@8387.3,9216.47 8392.54,9211.24 v1(8418.83,9211.24) 8421.45,9208.62 8421.45,9192.53 8441.03,9172.95 8524.71,9172.95 8565.27,9213.51 9550.49,9213.51 9608,9156 9741.66,9022.34 9755,9009 9755,8888 9722,8855 9643.51,8855 9637.51,8861 9637.51,8864.51 9657,8884 ; 9657,8884 9672,8899 J24.2@9689,8899 9674,8884 9657,8884
LVDS9_N: D1O.6 IC20O.5 J24.6 | length 2293.5
  TopLayer w6: v1(8230,9492.06) 8230,9494.01 8234.94,9498.95 IC20O.5@8261.51,9498.95 8281.24,9498.95 8285.09,9502.8 8348.38,9502.8 8471.59,9626 9109,9626 9495,9240 9495,8703.03 9558.53,8639.5 9616.47,8639.5 9675.97,8699 J24.6@9689,8699
  Bottom Layer w6: v1(8230,9492.06) 8230,9488.77 8231.59,9487.18 D1O.6@8231.59,9511.75
LVDS9_P: D1O.1 IC20O.6 J24.5 | length 2306.7
  TopLayer w6: v1(8200.92,9506.51) 8200.92,9509.23 8210.33,9518.64 IC20O.6@8261.51,9518.64 8281.24,9518.64 8285.09,9514.8 8343.41,9514.8 8389.62,9561 8466.62,9638 9113.97,9638 9507,9244.97 9507,8708 9563.5,8651.5 9611.5,8651.5 9626,8666 9626,8681 9608,8699 J24.5@9589,8699
  Bottom Layer w6: D1O.1@8169.39,9511.75 8174.62,9506.51 v1(8200.92,9506.51)
LVDS10_N: D1N.6 IC20N.5 J24.9 | length 3020.5
  TopLayer w6: v1(8449.9,9393.56) 8449.9,9397.57 8452.86,9400.53 IC20N.5@8479.43,9400.53
  Bottom Layer w6: D1N.6@8449.5,9413.32 v1@8449.5,9396.83 ; v1(8449.9,9393.56) 8449.9,9396.43 v1@8449.5,9396.83 ; J24.9@9589,8499 9632,8542 9651,8542 9818.97,8542 9910,8633.03 9910,9144.97 9653.97,9401 8868,9401 ccw(c8868,9395) 8862,9395 8862,9374 8836,9374 8836,9495 ccw(c8830,9495) 8830,9501 8792,9501 ccw(c8792,9495) 8786,9495 8786,9374 8760,9374 8760,9495 ccw(c8754,9495) 8754,9501 8716,9501 ccw(c8716,9495) 8710,9495 8710,9401 8527,9401 8506,9380 8466.33,9380 v1@8449.5,9396.83
LVDS10_P: D1N.1 IC20N.6 J24.8 | length 3055.9
  TopLayer w6: v1(8418.83,9408.09) 8418.83,9410.8 8428.24,9420.21 IC20N.6@8479.43,9420.21
  Bottom Layer w6: D1N.1@8387.3,9413.32 8392.54,9408.09 v1(8418.83,9408.09) 8418.83,9400.85 8431.06,9388.63 8431.06,9385.75 8442.09,9374.72 8444.97,9374.72 8451.68,9368 8466.33,9368 8510.97,9368 8531.97,9389 8716,9389 ccw(c8716,9395) 8722,9395 8722,9489 8748,9489 8748,9368 ccw(c8754,9368) 8754,9362 8792,9362 ccw(c8792,9368) 8798,9368 8798,9489 8824,9489 8824,9368 ccw(c8830,9368) 8830,9362 8868,9362 ccw(c8868,9368) 8874,9368 8874,9389 9649,9389 9898,9140 9898,8638 9814,8554 9651,8554 9651,8564 9657.5,8570.5 9660.5,8570.5 J24.8@9689,8599
LVDS11_N: D1M.6 IC20M.5 J24.12 | length 3032
  TopLayer w6: v1(8230.92,9289.94) 8230.92,9298.35 8234.94,9302.38 IC20M.5@8261.51,9302.38
  Bottom Layer w6: 8219,9265 8246,9265 8331,9350 8746.54,9350 9181.5,9350 9626.97,9350 9859,9117.97 9859,8700.08 9802.92,8644 9547.97,8644 9518,8614.03 9518,8486 9551,8453 9628,8453 9646,8435 9649.51,8431.49 9649.51,8415 J24.12@9659,8405.51 ; 8219,9266 8213,9272 8213,9291.09 8229.76,9291.09 v1(8230.92,9289.94) 8231.59,9290.61 D1M.6@8231.59,9315.17 ; J24.12@9665.51,8399 J24.12@9659,8405.51 ; J24.12@9689,8399 9682.49,8405.51 J24.12@9659,8405.51
LVDS11_P: D1M.1 IC20M.6 J24.11 | length 3068.3
  TopLayer w6: v1(8200.92,9309.94) 8200.92,9312.65 8210.33,9322.06 IC20M.6@8261.51,9322.06
  Bottom Layer w6: D1M.1@8169.39,9315.17 8174.62,9309.94 v1(8200.92,9309.94) 8200.92,9266.11 8214.03,9253 8250.97,9253 8335.97,9338 8741.57,9338 9186.47,9338 9622,9338 9847,9113 9847,8705.05 9797.95,8656 9543,8656 9506,8619 9506,8481.03 9542.51,8444.51 9546.03,8441 9623.03,8441 9637.51,8426.51 9637.51,8414.51 9628.03,8405.03 9622,8399 J24.11@9589,8399
LVDS12_N: D1L.6 IC20L.5 J24.15 | length 2981.9
  TopLayer w6: v1(8230.92,9092.81) 8230.92,9101.23 8234.94,9105.25 IC20L.5@8261.51,9105.25
  Bottom Layer w6: D1L.6@8231.59,9118.05 8231.59,9093.48 v1(8230.92,9092.81) 8229.76,9093.97 8199.31,9093.97 8199.31,9078.72 8214.86,9063.17 8240.1,9063.17 8252.46,9075.54 8252.46,9096.15 8265.35,9109.04 8285.96,9109.04 8322.7,9145.77 8430,9145.77 8450.54,9125.23 9243.74,9125.23 9290.51,9078.46 9290.51,9001.46 9329.4,8962.57 9329.4,8874.73 9343.4,8874.73 cw(c9343.4,8868.73) 9349.4,8868.73 9349.4,8830.73 cw(c9343.4,8830.73) 9343.4,8824.73 9309.4,8824.73 9309.4,8798.73 9343.4,8798.73 cw(c9343.4,8792.73) 9349.4,8792.73 9349.4,8754.73 cw(c9343.4,8754.73) 9343.4,8748.73 9309.4,8748.73 9309.4,8722.73 9343.4,8722.73 cw(c9343.4,8716.73) 9349.4,8716.73 9349.4,8678.73 cw(c9343.4,8678.73) 9343.4,8672.73 9309.4,8672.73 9309.4,8646.73 9343.4,8646.73 cw(c9343.4,8640.73) 9349.4,8640.73 9349.4,8602.73 cw(c9343.4,8602.73) 9343.4,8596.73 9309.4,8596.73 9309.4,8570.73 9343.4,8570.73 cw(c9343.4,8564.73) 9349.4,8564.73 9349.4,8526.73 cw(c9343.4,8526.73) 9343.4,8520.73 9309.4,8520.73 9309.4,8494.73 9343.4,8494.73 cw(c9343.4,8488.73) 9349.4,8488.73 9349.4,8450.73 cw(c9343.4,8450.73) 9343.4,8444.73 9329.4,8444.73 9329.4,8413.6 9480,8263 9483.51,8259.49 9483.51,8207.46 9537.97,8153 9613,8153 9636,8176 9636,8240 9629,8247 9606,8247 9589,8230 J24.15@9589,8199
LVDS12_P: D1L.1 IC20L.6 J24.14 | length 3024.7
  TopLayer w6: v1(8200.92,9112.81) 8200.92,9115.53 8210.33,9124.94 IC20L.6@8261.51,9124.94
  Bottom Layer w6: D1L.1@8169.39,9118.05 8174.62,9112.81 v1(8200.92,9112.81) 8187.31,9099.2 8187.31,9073.75 8206.37,9054.68 8209.89,9051.17 8245.07,9051.17 8248.58,9054.68 8327.67,9133.77 8425.03,9133.77 8445.57,9113.23 9238.77,9113.23 9278.51,9073.49 9278.51,8996.49 9317.4,8957.6 9317.4,8868.73 ccw(c9323.4,8868.73) 9323.4,8862.73 9337.4,8862.73 9337.4,8836.73 9303.4,8836.73 ccw(c9303.4,8830.73) 9297.4,8830.73 9297.4,8792.73 ccw(c9303.4,8792.73) 9303.4,8786.73 9337.4,8786.73 9337.4,8760.73 9303.4,8760.73 ccw(c9303.4,8754.73) 9297.4,8754.73 9297.4,8716.73 ccw(c9303.4,8716.73) 9303.4,8710.73 9337.4,8710.73 9337.4,8684.73 9303.4,8684.73 ccw(c9303.4,8678.73) 9297.4,8678.73 9297.4,8640.73 ccw(c9303.4,8640.73) 9303.4,8634.73 9337.4,8634.73 9337.4,8608.73 9303.4,8608.73 ccw(c9303.4,8602.73) 9297.4,8602.73 9297.4,8564.73 ccw(c9303.4,8564.73) 9303.4,8558.73 9337.4,8558.73 9337.4,8532.73 9303.4,8532.73 ccw(c9303.4,8526.73) 9297.4,8526.73 9297.4,8488.73 ccw(c9303.4,8488.73) 9303.4,8482.73 9337.4,8482.73 9337.4,8456.73 9323.4,8456.73 ccw(c9323.4,8450.73) 9317.4,8450.73 9317.4,8408.63 9471.51,8254.51 9471.51,8202.49 9533,8141 9617.97,8141 9648,8171.03 9648,8258 J24.14@9689,8299
LVDS13_N: D1K.6 IC20K.5 J24.18 | length 3074.4
  TopLayer w6: v1(8238.82,7382) 8242.62,7385.8 IC20K.5@8269.19,7385.8 8288.92,7385.8 8292.76,7389.65 8346.97,7389.65 8403.33,7446 8438.17,7446 8442.24,7441.93 8467.79,7441.93 8471.86,7446 8562,7446 ccw(c8562,7452) 8568,7452 8568,7476 8594,7476 8594,7422 ccw(c8600,7422) 8600,7416 8638,7416 ccw(c8638,7422) 8644,7422 8644,7446 8683.18,7446 8704.74,7467.56 ccw(c8700.5,7471.8) 8706.5,7471.8 ccw(c8700.5,7471.8) 8704.74,7476.04 ; 8704.72,7476.06 8660.27,7520.51 8644.51,7520.51 8641,7517 8628,7530 8628,7546 8639,7557 8660.55,7557 8664.74,7552.81 8706.15,7511.4 8712.78,7504.78 8744.34,7473.21 ccw(c8748.58,7477.46) 8752.82,7473.21 ; 8752.84,7473.23 8779.67,7500.06 ; 8779.67,7508.59 8741.51,7546.75 8759.89,7565.14 8798.08,7526.95 ccw(c8802.32,7531.2) 8806.56,7526.95 ; 8779.69,7500.08 ccw(c8775.45,7504.33) 8781.45,7504.33 ccw(c8775.45,7504.33) 8779.69,7508.57 ; 8806.58,7526.97 8833.43,7553.82 ccw(c8829.19,7558.07) 8835.19,7558.07 ccw(c8829.19,7558.07) 8833.43,7562.31 8795.25,7600.49 8813.63,7618.88 8851.82,7580.69 ccw(c8856.06,7584.94) 8860.3,7580.69 8887.15,7607.55 ccw(c8882.93,7611.81) 8888.93,7611.81 ccw(c8882.93,7611.81) 8887.17,7616.05 8848.99,7654.23 8867.37,7672.62 8905.56,7634.43 ccw(c8909.8,7638.68) 8914.04,7634.43 8940.91,7661.3 ccw(c8936.67,7665.55) 8942.67,7665.55 ccw(c8936.67,7665.55) 8940.91,7669.79 8902.73,7707.97 8921.11,7726.36 8938.09,7709.39 ccw(c8942.33,7713.63) 8946.57,7709.39 ; 8946.59,7709.41 8980.18,7743 9259.97,7743 9281.53,7764.56 ccw(c9277.28,7768.8) 9283.28,7768.8 ccw(c9277.28,7768.8) 9281.51,7773.06 9264.56,7790.01 9282.94,7808.4 9321.12,7770.21 ccw(c9325.37,7774.46) 9329.63,7770.23 9356.48,7797.08 ccw(c9352.24,7801.33) 9358.24,7801.33 ccw(c9352.24,7801.33) 9356.46,7805.59 9320.62,7841.43 9339.01,7859.81 9374.87,7823.95 ccw(c9379.11,7828.2) 9383.37,7823.97 9410.22,7850.82 ccw(c9405.98,7855.07) 9411.98,7855.07 ccw(c9405.98,7855.07) 9410.22,7859.31 9374.36,7895.17 9392.75,7913.55 9428.61,7877.69 ccw(c9432.85,7881.94) 9437.11,7877.71 9463.94,7904.55 ccw(c9459.72,7908.81) 9465.72,7908.81 ccw(c9459.72,7908.81) 9463.94,7913.07 9428.1,7948.91 9446.49,7967.29 9482.35,7931.43 ccw(c9486.59,7935.68) 9490.85,7931.45 9517.7,7958.3 ccw(c9513.46,7962.55) 9519.46,7962.55 ccw(c9513.46,7962.55) 9517.7,7966.79 9479.52,8004.97 9497.9,8023.36 9514.87,8006.39 ccw(c9519.11,8010.63) 9523.38,8006.41 9562.97,8046 9632.97,8046 9685.97,8099 J24.18@9689,8099
  Bottom Layer w6: v1(8238.82,7382) 8238.82,7374.48 8239.27,7374.03 D1K.6@8239.27,7398.6
LVDS13_P: D1K.1 IC20K.6 J24.17 | length 3072.5
  TopLayer w6: v1(8208.6,7393.36) 8208.6,7396.08 8218.01,7405.49 IC20K.6@8269.19,7405.49 8288.92,7405.49 8292.76,7401.65 8342,7401.65 8398.35,7458 8443.14,7458 8447.21,7453.93 8462.82,7453.93 8466.89,7458 8556,7458 8556,7482 cw(c8562,7482) 8562,7488 8600,7488 cw(c8600,7482) 8606,7482 8606,7428 8632,7428 8632,7452 cw(c8638,7452) 8638,7458 8678.21,7458 8692.01,7471.8 8655.3,7508.51 8649.49,7508.51 8645.97,7505 8636.03,7505 8632.51,7508.51 8616,7525.03 8616,7550.97 8634.03,7569 8665.52,7569 8673.23,7561.29 8748.58,7485.94 8766.97,7504.33 8728.8,7542.49 cw(c8733.02,7546.75) 8728.78,7550.99 8755.65,7577.86 cw(c8759.89,7573.62) 8764.14,7577.87 8802.32,7539.68 8820.71,7558.07 8782.52,7596.25 cw(c8786.76,7600.49) 8782.52,7604.74 ; 8782.54,7604.75 8809.39,7631.61 cw(c8813.63,7627.36) 8817.88,7631.61 8856.06,7593.42 8874.45,7611.81 8836.28,7649.97 ; 8836.26,7649.99 cw(c8840.5,7654.23) 8836.26,7658.48 8863.11,7685.33 ; 8863.13,7685.35 cw(c8867.37,7681.1) 8871.62,7685.35 8909.8,7647.16 8928.19,7665.55 8890,7703.73 cw(c8894.24,7707.97) 8890,7712.22 ; 8890.02,7712.23 8916.87,7739.09 cw(c8921.11,7734.84) 8925.36,7739.09 8942.33,7722.11 8975.21,7755 9255,7755 9268.8,7768.8 9251.83,7785.77 cw(c9256.07,7790.01) 9251.85,7794.27 9278.7,7821.12 cw(c9282.94,7816.88) 9287.2,7821.11 9325.37,7782.94 9343.75,7801.33 9307.91,7837.17 cw(c9312.14,7841.43) 9307.89,7845.67 9334.76,7872.54 cw(c9339.01,7868.3) 9343.27,7872.52 9379.11,7836.68 9397.49,7855.07 9361.63,7890.92 cw(c9365.88,7895.17) 9361.65,7899.43 9388.5,7926.28 cw(c9392.75,7922.04) 9397.01,7926.26 9432.85,7890.42 9451.23,7908.81 9415.39,7944.65 cw(c9419.62,7948.91) 9415.37,7953.15 9442.24,7980.02 cw(c9446.49,7975.78) 9450.73,7980.02 9486.59,7944.16 9504.97,7962.55 9466.79,8000.73 cw(c9471.03,8004.97) 9466.81,8009.23 9493.66,8036.09 cw(c9497.9,8031.84) 9502.14,8036.09 9519.11,8019.11 9558,8058 9618,8058 9624,8064 J24.17@9589,8099
  Bottom Layer w6: D1K.1@8177.06,7398.6 8182.3,7393.36 v1(8208.6,7393.36)
LVDS14_N: D1J.3 IC20J.1 J24.21 R131J.1 | length 2917.4
  TopLayer w6: IC20J.1@8363.56,7544.27 8389.15,7544.27 v1(8401.94,7557.06) R131J.1@8401.94,7585.61
  Bottom Layer w6: D1J.3@8393.48,7537.38 8393.48,7548.6 v1(8401.94,7557.06) 8414.45,7569.57 8414.45,7583.42 8436.03,7605 8586.03,7605 8601.25,7620.22 cw(c8605.49,7615.98) 8609.73,7620.22 8626.71,7603.25 8645.09,7621.63 8606.91,7659.82 cw(c8611.15,7664.06) 8606.92,7668.32 8633.78,7695.17 cw(c8638.02,7690.93) 8642.28,7695.15 ; 8642.26,7695.17 8680.45,7656.99 8698.83,7675.37 8660.65,7713.56 cw(c8664.89,7717.8) 8660.66,7722.06 8687.52,7748.91 cw(c8691.76,7744.67) 8696.02,7748.89 8734.19,7710.73 8752.57,7729.11 8714.39,7767.3 cw(c8718.63,7771.54) 8714.4,7775.8 8741.26,7802.65 cw(c8745.5,7798.41) 8749.76,7802.63 8787.93,7764.47 8806.31,7782.85 8768.13,7821.04 ; 8768.14,7821.02 cw(c8772.37,7825.28) 8768.13,7829.52 8795,7856.39 ; 8794.98,7856.37 cw(c8799.24,7852.15) 8803.48,7856.39 8841.67,7818.21 8860.05,7836.59 8843.08,7853.56 cw(c8847.32,7857.81) 8843.1,7862.07 8936.03,7955 9199,7955 9199,8024 cw(c9205,8024) 9205,8030 9243,8030 cw(c9243,8024) 9249,8024 9249,7875 9275,7875 9275,8024 cw(c9281,8024) 9281,8030 9319,8030 cw(c9319,8024) 9325,8024 9325,7875 9351,7875 9351,7949 cw(c9357,7949) 9357,7955 9411.97,7955 9433.53,7933.44 cw(c9429.28,7929.2) 9435.28,7929.2 cw(c9429.28,7929.2) 9433.53,7924.96 9389.48,7880.92 9407.87,7862.53 9451.91,7906.57 cw(c9456.15,7902.33) 9460.42,7906.55 9511.97,7855 9612,7855 9634,7877 9634,7928 9627.5,7934.5 9592,7899 J24.21@9589,7899
LVDS14_P: D1J.4 IC20J.8 J24.20 R131J.2 | length 2953.8
  TopLayer w6: R131J.2@8438.95,7585.61 v1(8438.95,7560.17) 8454.86,7544.27 IC20J.8@8485.61,7544.27
  Bottom Layer w6: D1J.4@8455.69,7537.38 8448.2,7544.86 8448.2,7550.92 v1(8438.95,7560.17) 8426.45,7572.68 8426.45,7578.45 8441,7593 8591,7593 8605.49,7607.49 8622.46,7590.52 ccw(c8626.7,7594.76) 8630.97,7590.54 ; 8630.95,7590.52 8657.82,7617.39 ; 8657.8,7617.37 ccw(c8653.58,7621.63) 8659.58,7621.63 ccw(c8653.58,7621.63) 8657.8,7625.9 8619.63,7664.06 8638.02,7682.45 8676.2,7644.26 ccw(c8680.45,7648.5) 8684.71,7644.28 ; 8684.69,7644.26 8711.56,7671.13 ccw(c8707.32,7675.37) 8713.32,7675.37 ccw(c8707.32,7675.37) 8711.56,7679.62 8673.37,7717.8 8691.76,7736.19 8729.94,7698 ccw(c8734.19,7702.24) 8738.45,7698.02 8765.3,7724.87 ccw(c8761.06,7729.11) 8767.06,7729.11 ccw(c8761.06,7729.11) 8765.3,7733.36 8727.11,7771.54 8745.5,7789.93 8783.68,7751.74 ccw(c8787.93,7755.98) 8792.19,7751.76 ; 8792.17,7751.74 8819.04,7778.61 ; 8819.02,7778.59 ccw(c8814.8,7782.85) 8820.8,7782.85 ccw(c8814.8,7782.85) 8819.02,7787.12 ; 8819.04,7787.1 8780.85,7825.28 8799.24,7843.67 8837.42,7805.48 ccw(c8841.67,7809.72) 8845.93,7805.5 ; 8845.91,7805.48 8872.78,7832.35 ccw(c8868.54,7836.59) 8874.54,7836.59 ccw(c8868.54,7836.59) 8872.76,7840.86 ; 8872.78,7840.84 8855.81,7857.81 8941,7943 9205,7943 ccw(c9205,7949) 9211,7949 9211,8018 9237,8018 9237,7869 ccw(c9243,7869) 9243,7863 9281,7863 ccw(c9281,7869) 9287,7869 9287,8018 9313,8018 9313,7869 ccw(c9319,7869) 9319,7863 9357,7863 ccw(c9357,7869) 9363,7869 9363,7943 9407,7943 9420.8,7929.2 9376.76,7885.16 ; 9376.77,7885.18 ccw(c9381,7880.92) 9376.76,7876.67 9403.63,7849.8 ccw(c9407.87,7854.05) 9412.13,7849.82 ; 9412.11,7849.8 9456.15,7893.85 9507,7843 9616.97,7843 9646,7872.03 9646,7928 9646,7956 J24.20@9689,7999
LVDS15_N: D1F.3 IC20F.1 J24.24 R131F.1 | length 2978.9
  TopLayer w6: R131F.1@8256.31,6985.45 v1(8256.31,7013.99) 8269.11,7026.79 IC20F.1@8294.7,7026.79
  Bottom Layer w6: D1F.3@8264.78,7033.68 8264.78,7022.46 v1(8256.31,7013.99) 8243.81,7001.49 8243.81,6980 8465,6980 8503,6942 8584,6942 8584,7016 cw(c8590,7016) 8590,7022 8628,7022 cw(c8628,7016) 8634,7016 8634,6862 8660,6862 8660,6936 cw(c8666,6936) 8666,6942 8793,6942 8793,7004.27 cw(c8799,7004.27) 8799,7010.27 8837,7010.27 cw(c8837,7004.27) 8843,7004.27 8843,6942 9015,6942 9481,7408 9749,7408 9825,7484 9825,7818 9798,7845 9673.51,7845 9649.51,7821 9671.51,7799 J24.24@9689,7799